# Altium PCB HARDWARE.PcbDoc
Units mm, origin at the board's own origin, x right, y up, seen from the top; angles counter-clockwise.
Board outline 132.33 x 98.04 mm, 2 copper layers (Top Layer, Bottom Layer); 71 components, 54 nets, 339 pads, 33 vias.
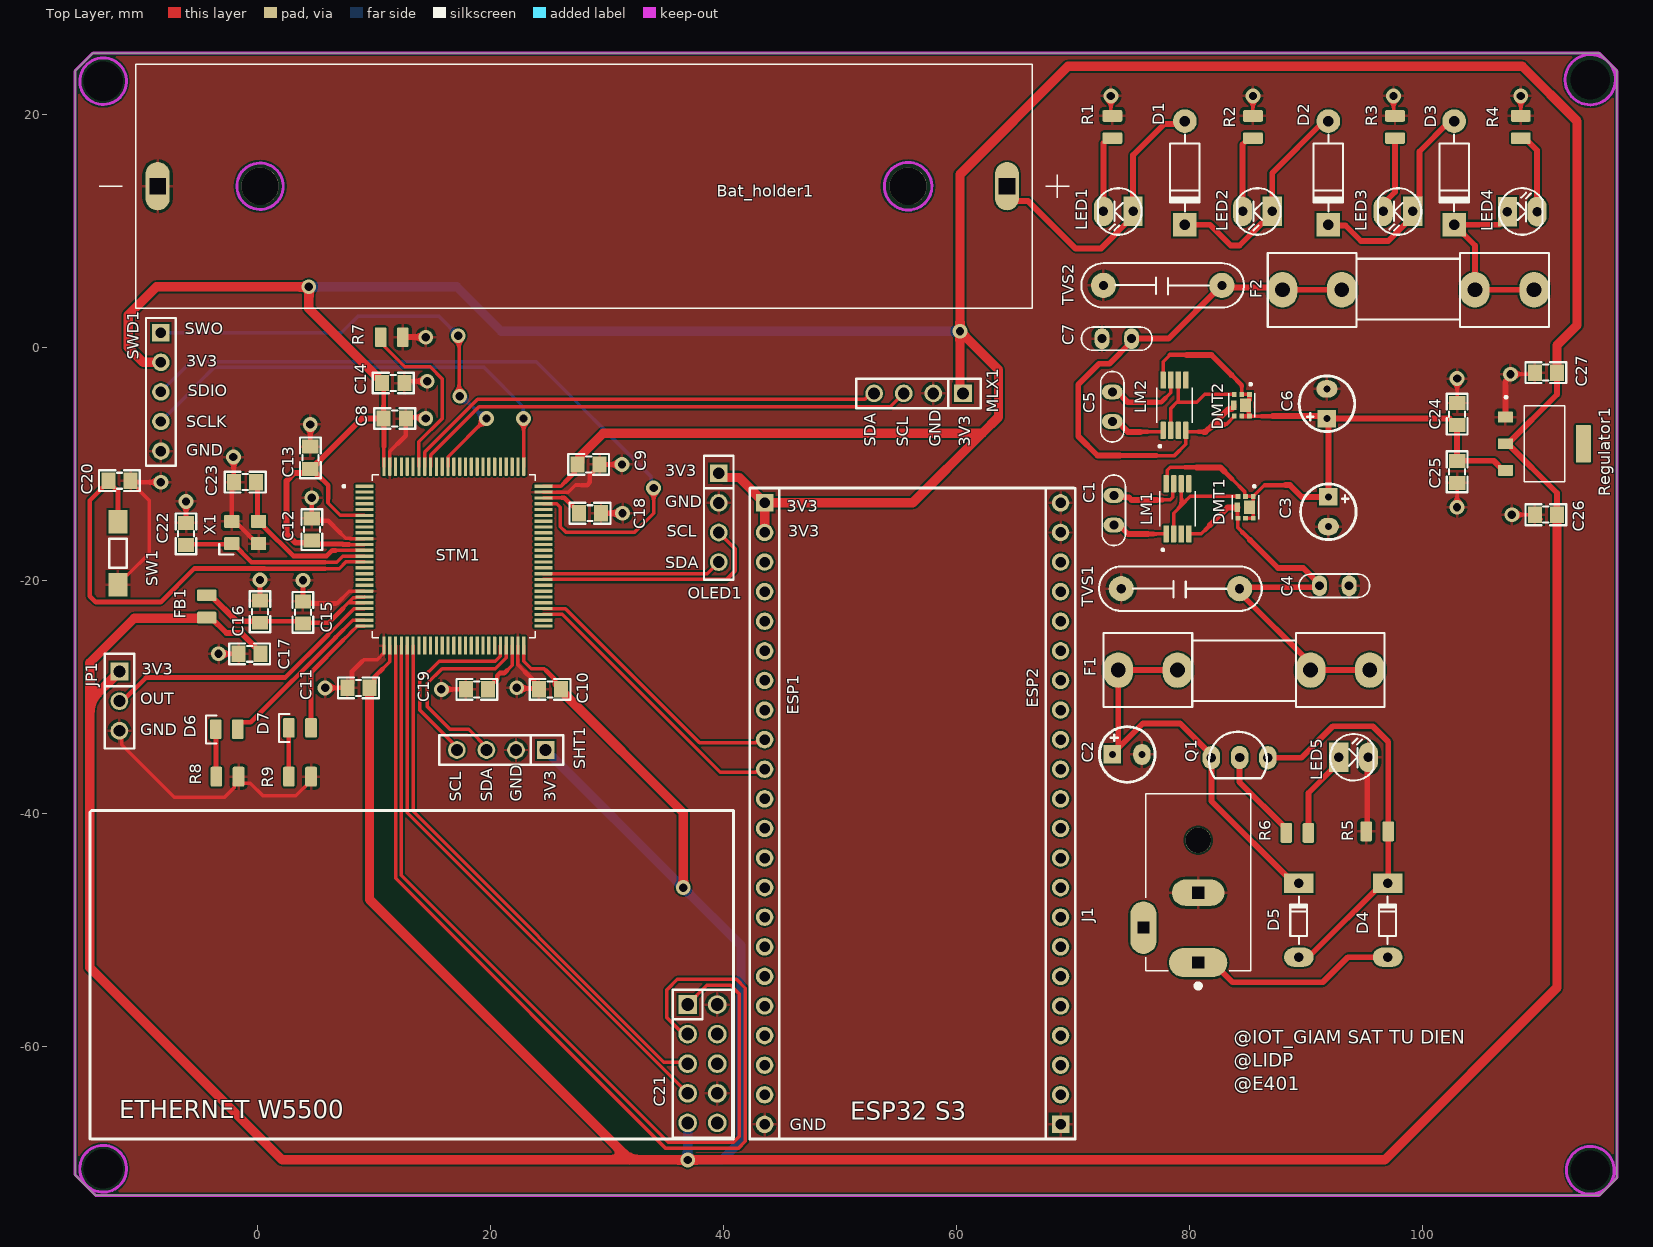
[diagram p0: Top Layer view]
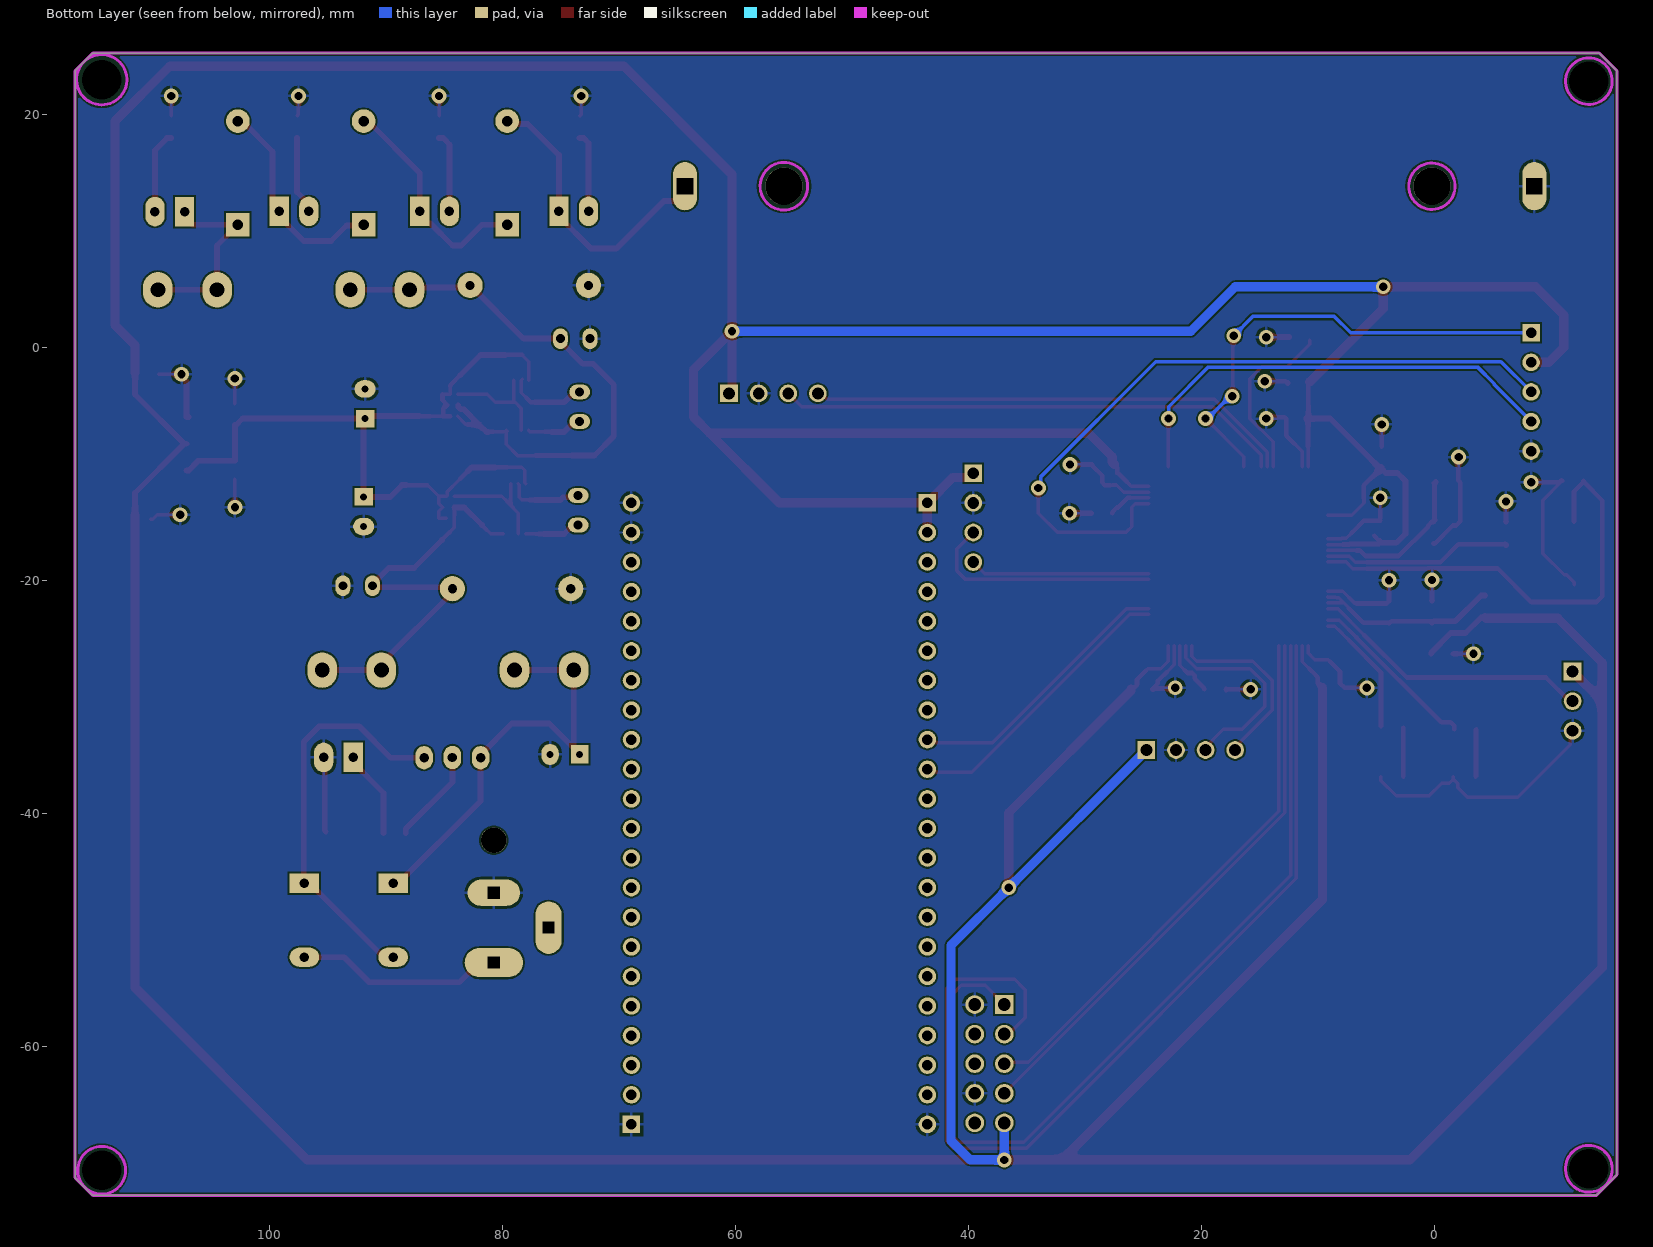
[diagram p1: Bottom Layer view, seen from below]
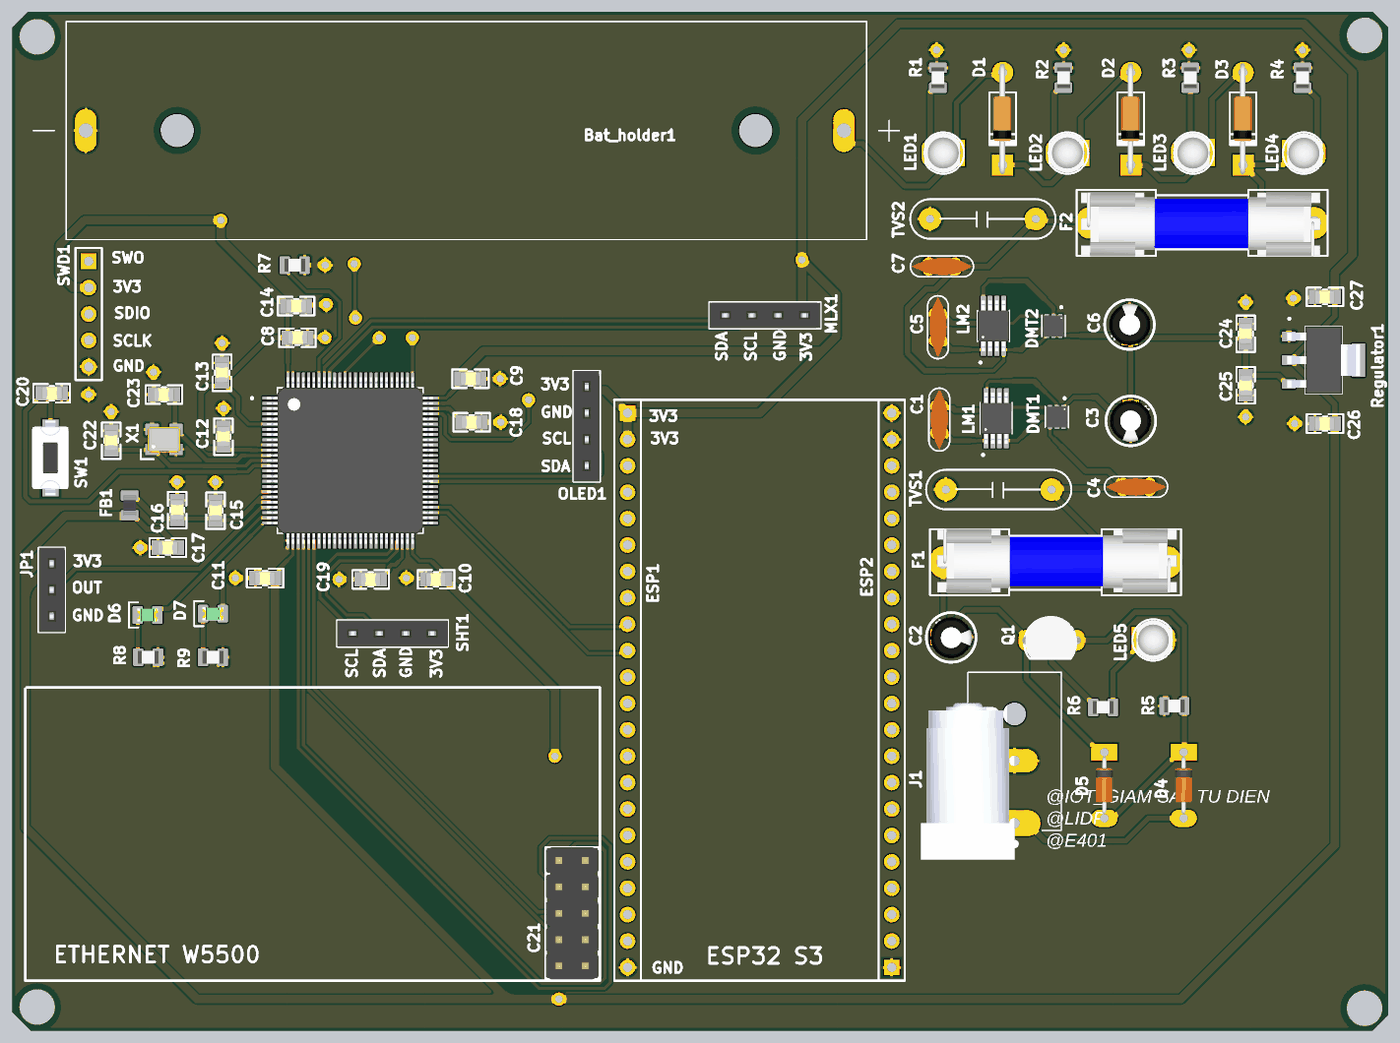
[diagram p2: 3D render of the assembled board from above, using the file's embedded part models]

## Layer stack, top to bottom
Top Solder: solder mask 0.0102, Solder Resist, Dk 3.5
Top Layer: signal copper 0.0356
Dielectric 1: dielectric 0.32, FR-4, Dk 4.8
Bottom Layer: signal copper 0.0356
Bottom Solder: solder mask 0.0102, Solder Resist, Dk 3.5

## Board outline
-15.621,-70.993 -13.843,-72.771 115.189,-72.771 116.713,-71.247 116.713,23.749 115.189,25.273 -14.097,25.273 -15.621,23.749

## Design rules (kind name [scope] priority, off if disabled: settings)
Clearance [All] p1: gap=0.15 ignorepadtopadclearanceinfootprint=FALSE
PolygonConnect [All] p1: connectstyle=Relief reliefconductorwidth=0.254 reliefentries=4 polygonreliefangle="90 Angle" airgapwidth=0.254
RoutingVias [All] p1: holewidth=0.711 width=1.27 viastyle="Through Hole" minholewidth=0.711 minwidth=1.27 maxholewidth=0.711 maxwidth=1.27
SolderMaskExpansion [All] p1: expansion=0.102 istentingtop=FALSE
UnRoutedNet [All] p1: checkbadconnections=TRUE
Width [All] p1: maxlimit=1 minlimit=0.254 preferedwidth=0.3 minimp=50.000000 maximp=50.000000 favimp=50.000000
29 further rules are at their usual default settings.

## Classes and differential pairs
component class Regulator: 32 C24 C25 C26 C27 Regulator1
component class POWER: Bat_holder1 C1 C2 C3 C4 C5 C6 C7 D4 D5 DMT1 DMT2 F1 F2 J1 LED5 LM1 LM2 Q1 R5 R6 TVS1 TVS2
component class MCU: C8 C9 C10 C11 C12 C13 C14 C15 C16 C17 C18 C19 C20 C21 C22 C23 D6 D7 ESP1 ESP2 FB1 JP1 MLX1 OLED1 R7 R8 R9 SHT1 STM1 SW1 SWD1 X1
component class Bat_indicator: D1 D2 D3 LED1 LED2 LED3 LED4 R1 R2 R3 R4

## Components (designator, comment, footprint, x,y, rotation, side; value= is the part's Value field where it differs from the comment)
Bat_holder1 "3.7V" BAT_BK-18650-PC2 28.067,13.843 r180 top
C1 "Capacitor Ceramic" CAP_CERAMIC 73.533,-15.24 r90 top value=33p
C2 "Cap Pol" C3MM 74.676,-34.925 r0 top
C3 "Cap Pol" C3MM 91.948,-14.097 r270 top
C4 "Capacitor Ceramic" CAP_CERAMIC 93.726,-20.447 r180 top value=33p
C5 "Capacitor Ceramic" CAP_CERAMIC 73.406,-6.35 r90 top value=33p
C6 "Cap Pol" C3MM 91.821,-4.826 r90 top
C7 "Capacitor Ceramic" CAP_CERAMIC 72.517,0.762 r0 top value=33p
C8 "100nF" "Cap 0805" 11.811,-6.096 r0 top
C9 "100nF" "Cap 0805" 28.448,-10.033 r0 top
C10 "100nF" "Cap 0805" 25.146,-29.337 r180 top
C11 "100nF" "Cap 0805" 8.706,-29.213 r180 top
C12 "100nF" "Cap 0805" 4.699,-15.621 r90 top
C13 "100nF" "Cap 0805" 4.569,-9.468 r90 top
C14 "4.7uF" "Cap 0805" 11.684,-3.048 r0 top
C15 "100nF" "Cap 0805" 3.937,-22.733 r90 top
C16 "100nF" "Cap 0805" 0.251,-22.676 r90 top
C17 "100nF" "Cap 0805" -0.635,-26.289 r180 top
C18 "2.2uF" "Cap 0805" 28.575,-14.224 r180 top
C19 "2.2uF" "Cap 0805" 18.866,-29.34 r180 top
C20 "100nF" "Cap 0805" -11.811,-11.43 r0 top
C21 "Ethernet W5500" JP5-D2T 38.227,-61.468 r270 top
C22 "10pF" "Cap 0805" -6.096,-16.002 r90 top
C23 "10pF" "Cap 0805" -1.016,-11.557 r180 top
C24 "10uF" "Cap 0805" 102.997,-5.715 r90 top
C25 "100nF" "Cap 0805" 102.997,-10.668 r270 top
C26 "10uF" "Cap 0805" 110.617,-14.351 r180 top
C27 "100nF" "Cap 0805" 110.617,-2.159 r180 top
D1 "1N4007" D1A 79.629,19.431 r90 top
D2 "1N4007" D1A 91.948,19.431 r90 top
D3 "1N4007" D1A 102.743,19.431 r90 top
D4 "1N4148" D0.5A 97.028,-49.149 r270 top
D5 "1N4148" D0.5A 89.408,-49.149 r270 top
D6 "GREEN" LED_0805_GREEN -2.601,-32.766 r0 top
D7 "GREEN" LED_0805_GREEN 3.683,-32.639 r0 top
DMT1 "DMT6016LFDF-7" TRANS_DMT6016LFDF-7 84.836,-13.716 r270 top
DMT2 "DMT6016LFDF-7" TRANS_DMT6016LFDF-7 84.52,-4.953 r270 top
ESP1 "ESP32 S3" HDR1X22 43.561,-13.335 r270 top
ESP2 "ESP32 S3" HDR1X22 68.961,-66.675 r90 top
F1 "F1A" Fuse 84.709,-27.686 r0 top value=Fuse
F2 "F1A" Fuse 98.806,4.953 r180 top value=Fuse
FB1 "100R" FB_0805 -4.318,-22.225 r270 top
J1 "PJ-058A" CUI_PJ-058A 80.772,-52.791 r90 top
JP1 "SOUND" "JP 1x3 CT" -11.811,-27.813 r270 top
LED1 "RED" LED-3 75.184,11.684 r180 top value="LED 3 ly Single Colour"
LED2 "YELLOW" LED-3 87.122,11.684 r180 top value="LED 3 ly Single Colour"
LED3 "YELLOW" LED-3 99.187,11.684 r180 top value="LED 3 ly Single Colour"
LED4 "GREEN" LED-3 107.315,11.666 r0 top value="LED 3 ly Single Colour"
LED5 "LED" LED-3 92.837,-35.179 r0 top value="LED 3 ly Single Colour"
LM1 "LM74610QDGKRQ1" SOP65P490X110-8N 78.994,-13.843 r90 top
LM2 "LM74610QDGKRQ1" SOP65P490X110-8N 78.74,-4.953 r90 top
MLX1 "JP4" JP4-C1T 60.579,-3.937 r180 top
OLED1 "JP4" JP4-C1T 39.624,-10.795 r270 top
Q1 "PNP" TRAN-LOWPOWER 84.189,-35.33 r270 top
R1 "220" RES_0805 73.406,18.923 r270 top
R2 "47" RES_0805 85.471,18.923 r270 top
R3 "220" RES_0805 97.663,18.923 r270 top
R4 "47" RES_0805 108.458,18.923 r270 top
R5 "1k" RES_0805 96.139,-41.529 r0 top
R6 "1k" RES_0805 89.281,-41.656 r180 top
R7 "10k" RES_0805 11.557,0.889 r180 top
R8 "220" RES_0805 -2.54,-36.83 r180 top
R9 "220" RES_0805 3.683,-36.83 r180 top
Regulator1 "AMS1117-5.0" SOT229P700X180-4N 110.49,-8.255 r270 top
SHT1 "JP4" JP4-C1T 24.765,-34.544 r180 top
STM1 "STM32H743VIT6" QFP50P1600X1600X160-100N 16.891,-17.907 r0 top
SW1 "DTSM-3" DTSM-3 -11.938,-17.653 r90 top
SWD1 "SWD" HDR1X5 -8.255,1.27 r270 top
TVS1 "TVS" CN4 84.328,-20.701 r180 top value="Zenner Protect AC input"
TVS2 "TVS" CN4 82.804,5.334 r180 top value="Zenner Protect AC input"
X1 "25MHz" XTAL_3225 -1.016,-15.875 r0 top

## Footprints (in the part's own frame and the unit in brackets; to place one, negate y for a bottom-side part, rotate by r counter-clockwise, add the part's x,y. Pads: shape width x height; smd on the part's side, far side on the other; paste and mask are expansions set on the pad)
BAT_BK-18650-PC2 [mm]
  oval 2.07x4.14 hole 1.38 square: NEG(36.6,0) POS(-36.3,0)
  round 3.2 hole 3.2 unplated: ""(-27.805,0) ""(27.81,0)
  silkscreen extent -41.63,-10.49 41.63,10.49
C3MM [mm]
  rect 1.5x1.58 hole 0.6: 1(-1.27,0)
  oval 1.5x1.8 hole 0.6: 2(1.27,0)
  silkscreen extent -2.39,-2.39 2.39,2.39, body extent -2,-2.03 1.99,1.97, height 7.01
"Cap 0805" [mm] "Compoment SMD 80x50mil"
  rect 1.2x1.4 smd: 1(-0.946,-0.003) 2(0.954,-0.003)
  silkscreen extent -1.75,-0.89 1.75,0.89, body extent -0.97,-0.61 1.03,0.64, height 1.23
CAP_CERAMIC [mil] "Tu gom mini"
  oval 50x70 hole 30: 1(0,0) 2(100,0)
  silkscreen extent -69,-39 169,39, body extent -65,-33 165,33, height 241
CN4 [mil] "Cap np W 0.4"
  round 85 hole 31: 1(0,0) 2(400,0)
  silkscreen extent -75,-75 475,75
CUI_PJ-058A [mm]
  oval 2.5x5 hole 1 square: 1(0,0)
  oval 2.25x4.5 hole 1 square: 2(6,0)
  oval 4.5x2.25 hole 1 square: 3(3,4.7)
  round 2.2 hole 2.2 unplated: ""(10.5,0)
  silkscreen extent -2.2,-4.5 14.5,4.5, body extent -3.5,-0.45 11.7,9, height 4.5
D0.5A [mil] "Diode muoi, W 80mil, L 300mil"
  oval 65x100 hole 32: 1(125,0)
  rect 65x100 hole 32: 2(-125,0)
  silkscreen extent -80,-30 80,28, body extent -108,-33 108,32, height 61
D1A [mil] "Diode 1A, W 100mil, L 350mil"
  round 80 hole 35: 1(0,0)
  rect 80x80 hole 35: 2(-350,0)
  silkscreen extent -305,-50 -45,50, body extent -386,-33 34,36, height 84
DTSM-3 [mm]
  rect 2x1.6 smd: 1(-2.7,0) 2(2.7,0)
  silkscreen extent -1.25,-0.75 1.25,0.75, body extent -3.6,-1.75 3.6,1.75, height 4.96
FB_0805 [mm]
  rrect25% 1x1.7 smd: 1(-0.95,0) 2(0.95,0)
  body extent -1,-0.63 1,0.63, height 0.86
Fuse [mil] "De Fuse"
  oval 100x120 hole 50: 1(-425,0) 1(-225,0) 2(225,0) 2(425,0)
  silkscreen extent -475,-125 475,125, body extent -448,-117 459,127, height 378
HDR1X5 [mm] "Connector; Header; 5 Position"
  rect 1.5x1.5 hole 0.9: 1(0,0)
  round 1.5 hole 0.9: 2(2.54,0) 3(5.08,0) 4(7.62,0) 5(10.16,0)
  silkscreen extent -1.27,-1.27 11.43,1.27
HDR1X22 [mm] "Connector; Header; 22 Position"
  rect 1.5x1.5 hole 0.9: 1(0,0)
  round 1.5 hole 0.9: 2(2.54,0) 3(5.08,0) 4(7.62,0) 5(10.16,0) 6(12.7,0) 7(15.24,0) 8(17.78,0) 9(20.32,0) 10(22.86,0) 11(25.4,0) 12(27.94,0) 13(30.48,0) 14(33.02,0) 15(35.56,0) 16(38.1,0) 17(40.64,0) 18(43.18,0) 19(45.72,0) 20(48.26,0) 21(50.8,0) 22(53.34,0)
  silkscreen extent -1.27,-1.27 54.61,1.27
JP4-C1T [mm] "4 row, straight, gold plating"
  rect 1.52x1.52 hole 1.02: 1(0,0)
  round 1.52 hole 1.02: 2(2.54,0) 3(5.08,0) 4(7.62,0)
  silkscreen extent -1.52,-1.27 9.14,1.27, body extent -1.52,-1.25 9.14,1.25, height 8.51
JP5-D2T [mm] "10 pins, dual pin, straight, gold plating"
  rect 1.6x1.6 hole 1.1: 1(-5.08,-1.27)
  round 1.6 hole 1.1: 2(-2.54,-1.27) 3(0,-1.27) 4(2.54,-1.27) 5(5.08,-1.27) 6(5.08,1.27) 7(2.54,1.27) 8(0,1.27) 9(-2.54,1.27) 10(-5.08,1.27)
  silkscreen extent -6.35,-2.54 6.35,2.54, body extent -6.35,-2.54 6.35,2.54, height 8.55
"JP 1x3 CT" [mm]
  rect 1.52x1.52 hole 1.02: 1(0,0)
  round 1.52 hole 1.02: 2(2.54,0) 3(5.08,0)
  silkscreen extent -1.52,-1.27 6.6,1.27, body extent -1.52,-1.25 6.6,1.25, height 8.51
LED-3 [mil] "LED 2 PIN, 3ly Only colour"
  rect 65x100 hole 32: 1(0,0)
  oval 65x100 hole 32: 2(100,0)
  silkscreen extent -29,-78 118,79, body extent -13,-75 125,75, height 217
LED_0805_GREEN [mm]
  rrect25% 1x1.7 smd: A(0.95,0) K(-0.95,0)
  silkscreen extent -1.8,-1.2 -0.9,1.2, body extent -1,-0.63 1,0.63, height 1.12
QFP50P1600X1600X160-100N [mm]
  rrect25% 1.56x0.28 smd: 1(-7.68,6) 2(-7.68,5.5) 3(-7.68,5) 4(-7.68,4.5) 5(-7.68,4) 6(-7.68,3.5) 7(-7.68,3) 8(-7.68,2.5) 9(-7.68,2) 10(-7.68,1.5) 11(-7.68,1) 12(-7.68,0.5) 13(-7.68,0) 14(-7.68,-0.5) 15(-7.68,-1) 16(-7.68,-1.5) 17(-7.68,-2) 18(-7.68,-2.5) 19(-7.68,-3) 20(-7.68,-3.5) 21(-7.68,-4) 22(-7.68,-4.5) 23(-7.68,-5) 24(-7.68,-5.5) 25(-7.68,-6) 51(7.68,-6) 52(7.68,-5.5) 53(7.68,-5) 54(7.68,-4.5) 55(7.68,-4) 56(7.68,-3.5) 57(7.68,-3) 58(7.68,-2.5) 59(7.68,-2) 60(7.68,-1.5) 61(7.68,-1) 62(7.68,-0.5) 63(7.68,0) 64(7.68,0.5) 65(7.68,1) 66(7.68,1.5) 67(7.68,2) 68(7.68,2.5) 69(7.68,3) 70(7.68,3.5) 71(7.68,4) 72(7.68,4.5) 73(7.68,5) 74(7.68,5.5) 75(7.68,6)
  rrect25% 0.28x1.56 smd: 26(-6,-7.68) 27(-5.5,-7.68) 28(-5,-7.68) 29(-4.5,-7.68) 30(-4,-7.68) 31(-3.5,-7.68) 32(-3,-7.68) 33(-2.5,-7.68) 34(-2,-7.68) 35(-1.5,-7.68) 36(-1,-7.68) 37(-0.5,-7.68) 38(0,-7.68) 39(0.5,-7.68) 40(1,-7.68) 41(1.5,-7.68) 42(2,-7.68) 43(2.5,-7.68) 44(3,-7.68) 45(3.5,-7.68) 46(4,-7.68) 47(4.5,-7.68) 48(5,-7.68) 49(5.5,-7.68) 50(6,-7.68) 76(6,7.68) 77(5.5,7.68) 78(5,7.68) 79(4.5,7.68) 80(4,7.68) 81(3.5,7.68) 82(3,7.68) 83(2.5,7.68) 84(2,7.68) 85(1.5,7.68) 86(1,7.68) 87(0.5,7.68) 88(0,7.68) 89(-0.5,7.68) 90(-1,7.68) 91(-1.5,7.68) 92(-2,7.68) 93(-2.5,7.68) 94(-3,7.68) 95(-3.5,7.68) 96(-4,7.68) 97(-4.5,7.68) 98(-5,7.68) 99(-5.5,7.68) 100(-6,7.68)
  silkscreen extent -9.54,-7 7,7, body extent -8,-8 8,8, height 1.6
RES_0805 [mm]
  rrect25% 1x1.7 smd: 1(-0.95,0) 2(0.95,0)
  body extent -1,-0.63 1,0.63, height 0.47
SOP65P490X110-8N [mm]
  rrect25% 1.47x0.48 smd: 1(-2.15,0.975) 2(-2.15,0.325) 3(-2.15,-0.325) 4(-2.15,-0.975) 5(2.15,-0.975) 6(2.15,-0.325) 7(2.15,0.325) 8(2.15,0.975)
  silkscreen extent -3.62,-1.54 1.5,1.54, body extent -2.45,-1.5 2.45,1.5, height 1.1
SOT229P700X180-4N [mm]
  rrect15% 0.93x1.31 smd: 1(-2.29,-3.345) 2(0,-3.345) 3(2.29,-3.345)
  rrect15% 3.24x1.31 smd: 4(0,3.345)
  silkscreen extent -4.09,-3.4 3.25,1.75, body extent -3.25,-3.5 3.25,3.5, height 1.8
TRAN-LOWPOWER [mm] "TO, Flat Index; 3 In-Line, Axial Leads; Body Dia. 4.5mm; Leads 0.51 x 0.48 mm (max)"
  oval 2x1.5 hole 0.8: 1(-0.127,-2.286) 2(-0.151,0.139) 3(-0.127,2.564)
  silkscreen extent -2.35,-2.48 1.63,2.48, body extent -2.48,-2.79 1.52,3.01, height 11
TRANS_DMT6016LFDF-7 [mm]
  rect 0.425x0.4 smd mask+0: 1(-0.937,0.65) 2(-0.937,0) 3(-0.937,-0.65) 4(0.937,-0.65) 5(0.937,0) 6(0.937,0.65)
  rect 0.8x0.48 smd mask+0.04: 7(0,-0.7)
  rect 1.15x0.95 smd paste-2 mask+0: 8(0,0.325)
  silkscreen extent -1.9,-1.12 1.02,1.12, body extent -1,-1 1,1, height 0.63
XTAL_3225 [mm]
  rrect10% 1.3x1.1 smd: 1(-1.15,-0.95) 2(1.15,-0.95) 3(1.15,0.95) 4(-1.15,0.95)
  silkscreen extent -2.23,-1.89 -1,-1, body extent -1.6,-1.28 1.6,1.22, height 0.61

## Part data
Bat_holder1: library part BK-18650-PC2, "Battery Holder (Open) 18650 1 Cell PC Pin", Package=None, Availability=Unavailable, MP=BK-18650-PC2, Price=None
C1 C4 C5 C7: library part CapCeramic, "Capacitor", LatestRevisionDate=17-Jul-2002, LatestRevisionNote="Re-released for DXP Platform.", PackageReference=RAD-0.3, Published=8-Jun-2000, Publisher="Altium Limited"
C2 C3 C6: "Polarized Capacitor (Axial)", LatestRevisionDate=17-Jul-2002, LatestRevisionNote="Re-released for DXP Platform.", PackageReference=POLAR0.8, Published=8-Jun-2000, Publisher="Altium Limited"
C8 C9 C10 C11 C12 C13 C14 C15 C16 C17 C18 C19 C20 C22 C23 C24 C25 C26 C27: library part "Cap 0805", "Capacitor SMD 0805"
C21: library part JP5x2, "WR-PHD 2.54 mm Dual Socket Header", Manufacturer="W¨¹rth Elektronik eiSos GmbH", partNo=61301021821, ComponentLink1 Description=Manufacturer, ComponentLink1URL=http://www.we-online.com, ComponentLink2 Description=Datasheet, ComponentLink2URL=http://katalog.we-online.de/em/datasheet/6130xx21821.pdf, Created by="Karrer Zheng", Created Date="29 March 2013", NoPins=10
D1 D2 D3: library part D1A, "Diode 1A"
D4 D5: library part D0.5A, "D0.5A"
D6 D7: library part LED_0805_GREEN, "LED 0805 GREEN SMD"
DMT1 DMT2: "Transistor, 60V, N-channel, enhancement mode MOSFET, 60V, U-DFN2020-6", Package="UDFN-6 Diodes Inc.", Check_prices=https://www.snapeda.com/parts/DMT6016LFDF-7/Diodes+Inc./view-part/?ref=eda, MF="Diodes Inc.", MP=DMT6016LFDF-7, SnapEDA_Link=https://www.snapeda.com/parts/DMT6016LFDF-7/Diodes+Inc./view-part/?ref=snap
ESP1 ESP2: library part "Header 22", "Header, 22-Pin", LatestRevisionDate=17-Jul-2002, LatestRevisionNote="Re-released for DXP Platform.", Publisher="Altium Limited"
F1 F2: library part Fuse, "Fuse", Designed by=VanDungEvn
FB1: library part FB_0805, "Ferrite Bead SMD 0805"
J1: "2.0 x 5.7 mm, 2.5 A, Horizontal, Through Hole, Locking Type, Dc Power Jack Connector", Package=None, Check_prices=https://www.snapeda.com/parts/PJ-058A/Same+Sky/view-part/?ref=eda, MF="Same Sky", MP=PJ-058A, SnapEDA_Link=https://www.snapeda.com/parts/PJ-058A/Same+Sky/view-part/?ref=snap
JP1: library part "JP 1x3 2.54 Cai Thang", "Cắm", Chung_Loai=Cắm, Don_Vi=Con, Ma_Hang=MH004006, Ten_Linh_Kien="Jump Đơn Cái 2.54MM 1x20P Thẳng"
LED1 LED2 LED3 LED4: library part LED, "LED Single colour Green and Red"
LED5: "LED Single colour Green and Red"
LM1 LM2: "0.48-V to 42-V, zero IQ automotive ideal diode controller 8-VSSOP -40 to 125", Case/Package=VSSOP, Manufacturer="Texas Instruments", Max Operating Temperature=125°C, Min Operating Temperature=-40°C, Operating Supply Current=0A, Package Quantity=2500, Quiescent Current=0pA, Supplier Part Number 1=595-LM74610QDGKRQ1, Category="Power Management ICs", ComponentLink1Description=http://www.ti.com/lit/ds/symlink/lm74610-q1.pdf?src-supplier=Digikey, ComponentLink1URL=http://www.ti.com/lit/ds/symlink/lm74610-q1.pdf?src-supplier=Digikey, Lead Free="Lead Free", Manufacturer Part Number=LM74610QDGKRQ1, Mount="Surface Mount", Number of Pins=8, Packaging="Cut Tape", Pricing 1="1=2.07, 10=1.54, 50=1.4, 100=1.25, 1000=1.1, 10000=1.01 (USD)", RoHS=Yes, RoHS Compliant=Yes, Series="Automotive, AEC-Q100", Stock 1=3008, Supplier 1=Mouser, Weight=0.005997oz
MLX1 OLED1 SHT1: "WR-PHD 2.54 mm Angled Socket Header", Manufacturer="W¨¹rth Elektronik eiSos GmbH", partNo=613004143121, ComponentLink1 Description=Manufacturer, ComponentLink1URL=http://www.we-online.com, ComponentLink2 Description=Datasheet, ComponentLink2URL=http://katalog.we-online.de/em/datasheet/6130xx143121.pdf, Created by="Karrer Zheng", Created Date="29 March 2013", NoPins=04
Q1: "PNP General", PackageDocument=Sep-1998, Code_JEDEC=TO-92A, ComponentLink1Description="Manufacturer Link", ComponentLink1URL=http://www.fairchildsemi.com/, ComponentLink2Description=Datasheet, ComponentLink2URL=http://www.fairchildsemi.com/ds/2N%2F2N3906.pdf, DatasheetDocument=1997, LatestRevisionDate=15-Jan-2003, LatestRevisionNote="PCB Footprint 'BCY-W3/D4.7' replaced", PackageReference=TO-92A, Published=8-Jun-2000, Publisher="Altium Limited"
R1 R2 R3 R4 R5 R6 R7 R8 R9: library part RES_0805, "Resistor SMD 0805"
Regulator1: "1A LOW DROPOUT VOLTAGE REGULATOR", Package="SOT-223 Seeed Technology", Availability="Not in stock", Check_prices=https://www.snapeda.com/parts/AMS1117-5.0/ams/view-part/?ref=eda, MF=ams, MP=AMS1117-5.0, Price=None, SnapEDA_Link=https://www.snapeda.com/parts/AMS1117-5.0/ams/view-part/?ref=snap
STM1: "ARMÂ® CortexÂ®-M7 STM32H7 Microcontroller IC 32-Bit Single-Core 480MHz 2MB (2M x 8) FLASH 100-LQFP (14x14)", Package="LQFP-100 STMicroelectronics", Check_prices=https://www.snapeda.com/parts/STM32H743VIT6/STMicroelectronics/view-part/?ref=eda, MF=STMicroelectronics, MP=STM32H743VIT6, SnapEDA_Link=https://www.snapeda.com/parts/STM32H743VIT6/STMicroelectronics/view-part/?ref=snap
SW1: "Tactile Switch SMD SPST", Manufacturer=Diptronics, Manufacturer Part Number=DTSM-3
SWD1: library part "Header 5", "Header, 5-Pin", LatestRevisionDate=17-Jul-2002, LatestRevisionNote="Re-released for DXP Platform.", Publisher="Altium Limited"
TVS1 TVS2: "Generic TVS Diode"
X1: library part TSX-3225_24.0000MF15X-AC, "Crystal SMD 24MHz 10PPM 7pF 3225", Manufacturer=Epson, Manufacturer Part Number="TSX-3225 24.0000MF15X-AC"

## Free pads (board coordinates)
  round 1.524 hole 3.4: 11(-13.208,-70.485) 12(-13.208,22.86) 13(114.427,22.987) 14(114.427,-70.612)

## Via types
v1: diameter 1.27, hole 0.711, Top Layer to Bottom Layer, 33 vias

## Nets (pads, with @x,y where several pads share a name; then routed paths per layer and width w, separated by ;. In a path a pad name is that pad's centre, name@x,y a point inside that pad or via, vN(x,y) a via of type N, cw(c..) or ccw(c..) an arc to the next point about the centre after c; other vN are vias at no path point)
3V3: C8.1 C9.1 C10.1 C11.1 C12.1 C13.1 C14.1 C17.1 C21.5 C26.1 C27.1 ESP1.1 ESP1.2 FB1.2 JP1.1 MLX1.1 OLED1.1 Regulator1.2 SHT1.1 STM1.6 STM1.11 STM1.27 STM1.50 STM1.75 STM1.100 SWD1.2 | length 680.3
  Top Layer w0.3: 6.096,-12.954 6.096,-13.362 7.141,-14.407 STM1.6 ; 7.89,-16.907 STM1.11 ; 10.795,-27.559 11.391,-26.963 STM1.27 ; STM1.100 10.891,-8.507 ; STM1.50 22.891,-26.924 23.526,-27.559 24.638,-27.559 24.765,-27.686 ; STM1.75 26.066,-11.907 26.416,-11.557
  Top Layer w0.4: C12.1@4.699,-16.759 4.808,-16.868 7.343,-16.868 7.382,-16.907 7.89,-16.907 ; C12.1 4.802,-16.567 5.202,-16.167 C12.1@5.202,-16.156 ; C13.1@4.799,-10.541 6.096,-11.838 6.096,-12.954 ; C11.1 10.052,-28.81 10.052,-28.302 10.16,-28.194 10.795,-27.559 ; C14.1@10.738,-2.951 10.865,-3.078 C8.1 ; 10.891,-8.507 C8.1@10.891,-6.125 ; 24.765,-27.686 25.565,-28.486 25.565,-28.934 C10.1@25.965,-29.334 ; 26.416,-11.557 27.178,-10.795 27.268,-10.795 27.268,-10.271 C9.1
  Top Layer w0.5: FB1.2 -3.968,-23.175 -2.632,-24.511 -1.364,-24.511 0.311,-26.186 C17.1 ; C12.1@4.699,-16.759 3.297,-16.759 2.54,-16.002 2.54,-11.43 3.206,-10.764 4.222,-10.764 C13.1 4.672,-10.414 8.987,-6.099 C8.1 ; Regulator1.2 Regulator1.2@107.335,-8.255 ; C26.1 111.563,-12.483 Regulator1.2@107.335,-8.255 ; C27.1 111.563,-4.027 Regulator1.2@107.335,-8.255
  Top Layer w0.8: JP1.1 -14.351,-30.353 ; SWD1.2 -9.779,-1.27 -11.049,0 -11.049,2.794 -8.636,5.207 v1(4.445,5.207) 4.445,3.342 C14.1@10.738,-2.951 ; FB1.2 -4.384,-23.241 -10.541,-23.241 -14.351,-27.051 -14.351,-30.353 ; C13.1@4.672,-10.414 C13.1@4.799,-10.541 ; C11.1 9.652,-47.371 32.004,-69.723 ; C8.1 C8.1@10.891,-6.125 ; C10.1 26.092,-29.434 36.576,-39.918 v1(36.576,-46.355) ; C9.1 27.702,-9.836 27.702,-9.382 29.718,-7.366 62.23,-7.366 ; OLED1.1 39.984,-11.155 41.381,-11.155 ESP1.1 ; ESP1.2 ESP1.1 ; MLX1.1 60.325,-3.683 v1(60.325,1.397) ; C26.1 111.563,-54.934 96.774,-69.723 v1(36.957,-69.723) 32.004,-69.723 ; C27.1 111.563,0.184 113.284,1.905 113.284,19.431 108.585,24.13 69.596,24.13 60.325,14.859 v1(60.325,1.397) ; -14.351,-30.353 -14.351,-53.213 2.159,-69.723 32.004,-69.723 ; ESP1.1 56.261,-13.335 62.23,-7.366 ; v1(60.325,1.397) 63.627,-1.905 63.627,-5.969 62.23,-7.366
  Bottom Layer w0.8: v1(4.445,5.207) 17.145,5.207 20.955,1.397 v1(60.325,1.397) ; SHT1.1 v1(36.576,-46.355) 41.529,-51.308 41.529,-68.072 39.878,-69.723 v1(36.957,-69.723) C21.5
5V: C21.6
E_SCLK: C21.1 STM1.29 | length 76
  Top Layer w0.3: STM1.29 12.391,-45.284 35.306,-68.199 40.894,-68.199 41.402,-67.691 41.402,-55.499 40.64,-54.737 38.608,-54.737 C21.1
E_SCS: C21.2 STM1.28 | length 85.1
  Top Layer w0.3: STM1.28 11.891,-45.546 35.052,-68.707 41.322,-68.707 41.91,-68.119 41.91,-54.991 41.148,-54.229 36.068,-54.229 35.179,-55.118 35.179,-57.531 36.183,-58.535 36.212,-58.535 36.605,-58.928 C21.2
ESP_RX: ESP1.10 STM1.53 | length 24.5
  Top Layer w0.3: STM1.53 26.209,-22.907 39.751,-36.449 42.785,-36.449 42.81,-36.425 43.437,-36.425 ESP1.10@43.461,-36.449
ESP_TX: ESP1.9 STM1.54 | length 23.6
  Top Layer w0.3: STM1.54 26.471,-22.407 37.973,-33.909 42.785,-33.909 42.81,-33.885 ESP1.9@43.434,-33.885
GND: Bat_holder1.NEG C2.2 C3.2 C4.1 C6.2 C7.1 C8.2 C9.2 C10.2 C11.2 C12.2 C13.2 C14.2 C15.2 C16.2 C17.2 C18.1 C19.2 C20.2 C21.7 C21.10 C22.2 C23.2 C24.2 C25.2 C26.2 C27.2 ESP1.22 ESP2.1 ESP2.21 ESP2.22 J1.2 JP1.3 LED5.2 MLX1.2 OLED1.2 R1.1 R2.1 R3.1 R4.1 R5.1 R7.1 R8.1 R9.1 Regulator1.1 SHT1.2 STM1.10 STM1.19 STM1.26 STM1.49 STM1.74 STM1.99 SW1.1 SWD1.5 TVS1.2 TVS2.2 X1.2 X1.4 | length 128.2
  Top Layer w0.3: SW1.1 -11.938,-20.153 -11.288,-19.503 -11.088,-19.503 -9.271,-17.686 -9.271,-13.119 -10.857,-11.533 C20.2 ; JP1.3 -11.617,-33.087 -11.617,-34.103 -7.112,-38.608 -2.794,-38.608 -1.94,-37.754 -1.94,-37.405 R8.1@-1.59,-37.055 ; R8.1 R8.1@-1.59,-37.055 ; R9.1 4.633,-37.18 3.332,-38.481 0.508,-38.481 -0.568,-37.405 -1.24,-37.405 R8.1@-1.59,-37.055 ; 6.731,-21.971 6.858,-21.971 7.922,-20.907 STM1.19 ; 7.112,-15.875 7.62,-16.383 8.001,-16.383 8.015,-16.397 9.201,-16.397 STM1.10 ; 9.017,-26.924 9.144,-26.797 10.301,-26.797 10.891,-26.207 STM1.26 ; STM1.99 11.391,-8.929 12.058,-8.262 ; STM1.49 22.391,-27.217 22.987,-27.813 ; STM1.74 26.709,-12.407 27.305,-11.811 27.813,-11.811 ; v1(73.279,21.59) 73.279,20 R1.1 ; R2.1 v1(85.471,21.59) ; v1(97.536,21.59) 97.536,20 R3.1 ; v1@102.994,-13.208 C25.2 C25.2@102.994,-11.298 ; v1@102.997,-2.864 102.997,-4.828 C24.2@103,-4.831 ; v1(107.569,-2.286) C27.2@109.539,-2.286 ; v1(107.696,-14.351) 109.659,-14.351 C26.2 110.047,-14.732 C26.2@110.236,-14.732 ; R4.1 v1(108.458,21.59)
  Top Layer w0.4: C20.2 -10.73,-11.557 v1(-8.255,-11.557) ; C22.2@-6.094,-14.919 v1@-6.094,-13.21 ; v1@-3.3,-26.287 C17.2@-1.907,-26.287 ; v1@-2.001,-9.429 -2.001,-11.396 -2.166,-11.561 X1.4 -1.816,-15.275 -1.516,-15.275 0.034,-16.825 X1.2 ; v1(0.251,-19.95) 0.251,-21.719 C16.2@0.252,-21.72 ; v1(3.937,-19.973) 3.937,-21.775 C15.2 ; C15.2 4.133,-21.971 6.731,-21.971 ; C13.2 v1(4.572,-6.604) ; C12.2@4.699,-14.859 6.096,-14.859 7.112,-15.875 ; C12.2 v1(4.702,-12.889) ; v1(5.842,-29.21) C11.2 8.152,-28.81 8.152,-27.789 9.017,-26.924 ; 12.058,-8.262 12.765,-7.555 C8.2 12.88,-5.985 v1@14.367,-5.985 ; C14.2 12.792,-2.898 v1(14.605,-2.898) ; v1(15.818,-29.34) C19.2@17.91,-29.339 ; v1@22.345,-29.27 C10.2@24.065,-29.27 ; 22.987,-27.813 23.622,-28.448 23.792,-28.618 23.792,-28.834 24.065,-29.107 C10.2@24.065,-29.27 ; C10.2@24.065,-29.334 C10.2@24.065,-29.27 ; C10.2@24.128,-29.27 C10.2@24.065,-29.27 ; 27.813,-11.811 28.321,-11.811 28.555,-11.577 28.555,-10.983 29.402,-10.136 C9.2 v1(31.312,-10.036)
  Top Layer w0.5: C20.2 C20.2 ; v1(-6.096,-13.208) v1@-6.094,-13.21 ; C22.2@-6.094,-14.919 C22.2@-6.093,-14.921 ; v1(-3.302,-26.289) v1@-3.3,-26.287 ; v1(-2.032,-9.398) v1@-2.001,-9.429 ; C17.2@-1.907,-26.287 -1.905,-26.286 C17.2 ; C16.2@0.252,-21.72 C16.2 ; R7.1 v1(14.478,0.889) ; C14.2 C14.2 ; v1@14.367,-5.985 v1(14.478,-6.096) ; v1(15.818,-29.34) v1(15.818,-29.34) ; C19.2@17.91,-29.339 C19.2 ; v1(22.282,-29.207) v1@22.345,-29.27 ; C10.2@24.128,-29.27 C10.2 ; C18.1 29.522,-14.222 31.367,-14.222 v1(31.369,-14.224) ; R5.1 95.283,-41.435 95.283,-35.273 LED5.2 ; Regulator1.1@106.955,-5.965 Regulator1.1 107.145,-2.918 107.569,-2.494 v1(107.569,-2.286)
  other v1: 102.994,-13.716 102.997,-2.667
INT: C21.9
IR_CAM_SCL: MLX1.3 STM1.92 | length 43.8
  Top Layer w0.3: STM1.92 14.901,-10.217 14.901,-9.229 19.05,-5.08 54.356,-5.08 MLX1.3
IR_CAM_SDA: MLX1.4 STM1.93 | length 41.9
  Top Layer w0.3: STM1.93 14.401,-10.217 14.401,-8.967 18.923,-4.445 52.173,-4.445 52.681,-3.937 MLX1.4
LCD_SCL: OLED1.3 STM1.59 | length 20.6
  Top Layer w0.3: STM1.59 40.291,-19.907 41.021,-19.177 41.021,-17.272 OLED1.3
LCD_SDA: OLED1.4 STM1.60 | length 15.5
  Top Layer w0.3: STM1.60 38.632,-19.407 OLED1.4
"MCU VDDA": C15.1 C16.1 FB1.1 STM1.20 STM1.21 | length 17
  Top Layer w0.3: 7.386,-22.372 7.386,-22.332 7.811,-21.907 ; STM1.21 7.811,-21.907 ; STM1.20 9.201,-21.417 8.499,-21.417 8.453,-21.463 8.255,-21.463 7.811,-21.907
  Top Layer w0.4: C16.1 0.381,-23.495 3.757,-23.495 C15.1 3.997,-23.622 6.136,-23.622 7.386,-22.372
  Top Layer w0.5: FB1.1 -3.968,-21.275 -1.748,-23.495 0.127,-23.495 C16.1
MCU_BOOT0: R7.2 STM1.94 | length 15.1
  Top Layer w0.3: R7.2@10.734,0.635 10.734,0.285 12.67,-1.651 14.859,-1.651 15.875,-2.667 15.875,-6.097 13.891,-8.081 STM1.94
MCU_NRST: C20.1 STM1.14 SW1.2 | length 39.5
  Top Layer w0.3: 5.861,-18.988 7.047,-18.988 7.628,-18.407 STM1.14
  Top Layer w0.4: C20.1 C20.1@-12.757,-11.533 ; SW1.2 -11.938,-12.352 C20.1@-12.757,-11.533 ; 5.861,-18.988 0.682,-18.988 0.659,-18.965 -5.376,-18.965 -8.255,-21.844 -13.843,-21.844 -14.351,-21.336 -14.351,-13.128 C20.1@-12.757,-11.533
MCU_OSC_IN: C22.1 STM1.13 X1.1 | length 16.2
  Top Layer w0.3: 5.842,-18.438 6.835,-18.438 7.366,-17.907 STM1.13
  Top Layer w0.4: C22.1@-6.031,-16.886 -2.005,-16.886 -0.476,-18.415 2.672,-18.415 2.695,-18.438 5.842,-18.438
  Top Layer w0.5: C22.1 C22.1@-6.031,-16.886
MCU_OSC_OUT: C23.1 STM1.12 X1.3 | length 14
  Top Layer w0.3: 6.731,-17.418 8.498,-17.418 8.499,-17.417 9.201,-17.417 STM1.12
  Top Layer w0.4: X1.3@0.032,-14.823 C23.1@0.032,-11.656 ; X1.3 0.234,-14.925 0.584,-15.275 0.584,-15.375 3.097,-17.888 5.988,-17.888 6.458,-17.418 6.731,-17.418
  Top Layer w0.5: C23.1 C23.1@0.032,-11.656 ; X1.3@0.032,-14.823 X1.3
MCU_SWCLK: STM1.76 SWD1.4 | length 39.7
  Top Layer w0.3: v1(22.86,-6.096) 22.881,-6.117 22.881,-10.217 STM1.76
  Bottom Layer w0.3: SWD1.4 -5.08,-3.175 -5.08,-3.097 -3.657,-1.674 19.454,-1.674 22.86,-5.08 v1(22.86,-6.096)
MCU_SWDIO: STM1.72 SWD1.3 | length 62.6
  Top Layer w0.3: STM1.72 25.726,-13.407 26.035,-13.716 26.035,-15.367 26.543,-15.875 32.385,-15.875 34.036,-14.224 v1(34.036,-12.065)
  Bottom Layer w0.3: SWD1.3 -5.669,-1.224 23.957,-1.224 33.85,-11.117 33.85,-11.879 v1(34.036,-12.065)
MCU_SWO: STM1.89 SWD1.1 | length 40.6
  Top Layer w0.3: STM1.89 16.401,-10.217 16.401,-9.38 v1(19.685,-6.096) ; v1(17.272,1.016) 17.335,0.953 17.335,-4.127 v1(17.399,-4.191)
  Bottom Layer w0.3: SWD1.1 7.239,1.27 8.636,2.667 15.621,2.667 v1(17.272,1.016) ; v1(17.399,-4.191) 17.589,-4.191 19.494,-6.096 v1(19.685,-6.096)
MISO: C21.4 STM1.30 | length 48.4
  Top Layer w0.3: STM1.30 12.891,-39.943 34.726,-61.779 34.728,-61.779 C21.4
MOSI: C21.3 STM1.31 | length 46.8
  Top Layer w0.3: STM1.31 13.391,-39.807 34.913,-61.329 36.818,-61.329 C21.3
NetBat_holder1_POS: Bat_holder1.POS D1.1 LED1.1 | length 25.4
  Top Layer w0.5: Bat_holder1.POS 64.367,13.313 65.092,12.588 66.152,12.588 70.231,8.509 72.453,8.509 75.184,11.239 LED1.1 75.184,16.51 77.863,19.189 79.387,19.189 D1.1
NetC1_1: C1.1 LM1.1 | length 4.8
  Top Layer w0.3: 76.962,-16.002 77.216,-16.002 77.225,-15.993 LM1.1
  Top Layer w0.4: 76.454,-16.002 76.962,-16.002
  Top Layer w0.5: C1.1 73.995,-15.24 74.757,-16.002 76.454,-16.002
NetC1_2: C1.2 LM1.7 | length 6.5
  Top Layer w0.3: 77.724,-13.081 78.359,-13.081 78.579,-12.861 78.579,-11.783 LM1.7
  Top Layer w0.4: 77.216,-13.081 77.724,-13.081
  Top Layer w0.5: C1.2 73.68,-12.847 74.823,-12.847 75.057,-13.081 77.216,-13.081
NetC2_1: C2.1 D5.2 F1.1 Q1.1 | length 36.9
  Top Layer w0.5: C2.1 73.406,-34.885 C2.1@73.914,-34.377 ; F1.1@78.994,-27.686 73.914,-27.686 C2.1@73.914,-34.377 ; D5.2 88.963,-45.974 81.903,-38.914 Q1.1 81.903,-34.953 79.208,-32.258 76.033,-32.258 C2.1@73.914,-34.377
NetC3_1: C3.1 C6.1 C24.1 C25.1 DMT1.1 DMT1.2 DMT1.5 DMT1.6 DMT1.8 DMT2.1 DMT2.2 DMT2.5 DMT2.6 DMT2.8 LM1.8 LM2.8 Regulator1.3 | length 66.3
  Top Layer w0.3: LM2.8 77.765,-1.229 78.359,-0.635 ; LM1.8 78.109,-11.603 78.109,-10.537 78.359,-10.287 79.629,-10.287 ; 83.693,-11.303 84.786,-12.396 84.786,-12.729 DMT1.2 DMT1.1 ; 84.52,-3.367 DMT2.2 DMT2.1 ; DMT1.5 DMT1.6 85.486,-14.041 DMT1.8 85.486,-13.391 DMT1.1 ; DMT2.6 86.185,-5.89 ; 86.487,-11.811 86.454,-11.811 85.549,-12.716 85.536,-12.716 85.486,-12.766 DMT1.1
  Top Layer w0.4: 78.359,-0.635 79.756,-0.635 ; 79.629,-10.287 80.645,-10.287 ; 83.058,-10.668 83.693,-11.303 ; 83.629,-2.349 84.52,-3.24 84.52,-3.367 ; DMT2.5 DMT2.6 85.17,-5.878 85.12,-5.828 85.12,-5.228 DMT2.8@84.972,-5.08 ; DMT2.8 84.845,-4.853 85.17,-4.528 DMT2.1 ; 86.185,-5.89 87.17,-5.89 ; 86.487,-11.811 88.265,-11.811
  Top Layer w0.5: 79.756,-0.635 81.915,-0.635 83.629,-2.349 ; 80.645,-10.287 82.677,-10.287 83.058,-10.668 ; DMT2.8 DMT2.8@84.972,-5.08 ; 87.17,-5.89 91.281,-5.89 91.44,-6.05 C6.1@91.44,-6.437 ; 88.265,-11.811 88.646,-11.811 89.662,-12.827 C3.1 91.948,-6.223 C6.1 102.336,-6.096 102.9,-6.661 C24.1 102.997,-6.664 102.997,-9.719 C25.1 106.132,-9.722 106.955,-10.545 Regulator1.3
NetC4_2: C4.2 DMT1.4 DMT1.7 F1.2 LM1.4 TVS1.1 | length 37.6
  Top Layer w0.3: LM1.4 81.035,-15.993 81.407,-15.621 ; DMT1.7@84.161,-13.741 84.161,-14.629 DMT1.4 84.186,-15.479 84.582,-15.875
  Top Layer w0.4: 81.407,-15.621 81.788,-15.24 ; 84.582,-15.875 85.217,-16.51
  Top Layer w0.5: 81.788,-15.24 83.287,-13.741 DMT1.7@84.161,-13.741 ; 85.217,-16.51 87.63,-18.923 89.789,-18.923 91.186,-20.32 C4.2 91.059,-20.574 84.455,-20.574 TVS1.1 84.328,-21.019 90.424,-27.115 90.424,-27.686 F1.2@95.504,-27.686
NetC5_1: C5.1 LM2.1 | length 4.8
  Top Layer w0.3: 76.454,-7.239 77.675,-7.239 77.765,-7.149 LM2.1
  Top Layer w0.4: 75.819,-7.239 76.454,-7.239
  Top Layer w0.5: C5.1 73.841,-6.35 74.73,-7.239 75.819,-7.239
NetC5_2: C5.2 LM2.7 | length 6.9
  Top Layer w0.3: 77.978,-4.318 78.415,-3.881 LM2.7 LM2.7@78.325,-2.713
  Top Layer w0.4: 77.216,-4.699 77.597,-4.699 77.978,-4.318
  Top Layer w0.5: C5.2 73.841,-3.81 74.73,-4.699 77.216,-4.699
NetC7_2: C7.2 DMT2.4 DMT2.7 F2.2 LM2.4 TVS2.1 | length 49.7
  Top Layer w0.3: 77.216,-9.271 78.74,-9.271 79.715,-8.296 LM2.4 LM2.4@79.625,-7.193 ; LM2.4@79.805,-7.239 80.772,-7.239 ; 83.058,-6.604 83.169,-6.604 83.87,-5.903 DMT2.4
  Top Layer w0.4: 74.041,-9.271 77.216,-9.271 ; 80.772,-7.239 81.28,-7.239 ; 82.677,-6.604 83.058,-6.604
  Top Layer w0.5: 74.041,-9.271 72.136,-9.271 70.485,-7.62 70.485,-3.175 72.263,-1.397 73.152,-1.397 75.057,0.508 C7.2 78.232,0.762 TVS2.1 82.995,5.143 87.82,5.143 88.011,4.953 F2.2@93.091,4.953 ; 81.28,-7.239 81.407,-7.239 82.042,-6.604 ; 82.677,-6.604 82.042,-6.604 ; DMT2.7 83.82,-5.093 83.612,-5.301 83.345,-5.301 82.042,-6.604
NetC18_2: C18.2 STM1.73 | length 3.7
  Top Layer w0.3: STM1.73 26.162,-12.907
  Top Layer w0.4: 26.162,-12.907 26.369,-12.907 27.186,-13.724 27.286,-13.724 27.686,-14.124 C18.2@27.686,-14.224
NetC19_1: C19.1 STM1.48 | length 4.8
  Top Layer w0.3: 21.463,-27.686 21.891,-27.258 STM1.48
  Top Layer w0.4: C19.1 19.812,-29.237 20.612,-28.437 20.612,-28.174 20.846,-27.94 21.209,-27.94 21.463,-27.686
NetD1_2: D1.2 D2.1 LED2.1 | length 19.7
  Top Layer w0.5: D1.2 81.788,10.541 83.566,8.763 84.328,8.763 86.229,10.664 86.546,10.664 87.122,11.239 LED2.1 87.122,14.986 91.567,19.431 D2.1
NetD2_2: D2.2 D3.1 LED3.1 | length 18.6
  Top Layer w0.5: D2.2 92.024,10.465 93.421,10.465 94.742,9.144 97.091,9.144 99.187,11.239 LED3.1 99.763,12.26 99.763,16.832 102.362,19.431 D3.1
NetD3_2: D3.2 F2.1 LED4.1 | length 16.7
  Top Layer w0.5: LED4.1 107.315,11.222 106.634,10.541 D3.2 104.521,8.763 104.521,4.953 F2.1@109.601,4.953
NetD4_1: D4.1 J1.1 | length 17.9
  Top Layer w0.5: J1.1 82.022,-52.791 83.714,-54.483 91.46,-54.483 93.619,-52.324 D4.1
NetD4_2: D4.2 D5.1 Q1.3 R5.2 | length 34.4
  Top Layer w0.5: Q1.3 89.638,-35.203 92.329,-32.512 95.758,-32.512 97.089,-33.843 R5.2 97.089,-45.913 D4.2 96.584,-45.974 90.454,-52.104 89.628,-52.104 D5.1
NetD6_A: D6.A STM1.24 | length 14.9
  Top Layer w0.3: 6.731,-24.892 8.206,-23.417 9.201,-23.417 STM1.24
  Top Layer w0.4: D6.A -1.651,-32.474 -1.351,-32.174 -0.551,-32.174 6.731,-24.892
NetD6_K: D6.K R8.2 | length 4.1
  Top Layer w0.4: D6.K -3.521,-32.797 -3.521,-36.799 R8.2
NetD7_A: D7.A STM1.25 | length 10.9
  Top Layer w0.3: 7.366,-25.146 8.001,-24.511 8.001,-24.497 8.591,-23.907 STM1.25
  Top Layer w0.4: D7.A@4.633,-32.512 4.633,-27.879 7.366,-25.146
NetD7_K: D7.K R9.2 | length 4.2
  Top Layer w0.4: R9.2 D7.K
NetDMT1_3: DMT1.3 LM1.2 LM1.6 | length 9.8
  Top Layer w0.3: LM1.2 78.669,-14.213 79.319,-13.563 ; LM1.6 79.319,-13.563 ; DMT1.3 80.103,-12.779 79.319,-13.563
NetDMT2_3: DMT2.3 LM2.2 LM2.6 | length 9.8
  Top Layer w0.3: LM2.2 78.415,-5.233 78.949,-4.699 ; LM2.6 79.065,-4.583 78.949,-4.699 ; DMT2.3 81.328,-4.016 80.645,-4.699 78.949,-4.699
NetLED1_2: LED1.2 R1.2 | length 6.8
  Top Layer w0.5: LED1.2 72.644,17.561 73.056,17.973 R1.2
NetLED2_2: LED2.2 R2.2 | length 6.9
  Top Layer w0.5: LED2.2 84.582,17.434 85.121,17.973 R2.2
NetLED3_2: LED3.2 R3.2 | length 6.7
  Top Layer w0.5: LED3.2 96.647,12.325 97.663,13.341 R3.2
NetLED4_2: LED4.2 R4.2 | length 7.1
  Top Layer w0.5: R4.2 108.808,17.973 109.855,16.926 LED4.2
NetLED5_1: LED5.1 R6.1 | length 7.6
  Top Layer w0.5: R6.1 90.231,-38.229 92.837,-35.623 LED5.1
NetQ1_2: Q1.2 R6.2 | length 8.1
  Top Layer w0.5: Q1.2 84.328,-37.303 88.331,-41.306 R6.2
RST: C21.8
SHT_SCL: SHT1.4 STM1.46 | length 15.9
  Top Layer w0.3: SHT1.4@17.272,-34.417 13.97,-31.115 13.97,-28.575 15.621,-26.924 20.447,-26.924 20.881,-26.49 20.881,-25.597 STM1.46
SHT_SDA: SHT1.3 STM1.47 | length 17.4
  Top Layer w0.3: SHT1.3@19.812,-34.417 18.161,-32.766 16.559,-32.766 14.605,-30.812 14.605,-28.829 15.875,-27.559 20.448,-27.559 21.381,-26.626 21.381,-25.597 STM1.47
SOUND_OUT: JP1.2 STM1.22 | length 24.3
  Top Layer w0.3: 6.096,-24.638 8.317,-22.417 9.201,-22.417 STM1.22
  Top Layer w0.4: JP1.2 -11.557,-30.353 -9.525,-28.321 2.413,-28.321 6.096,-24.638
pads on no net: Bat_holder1. ESP1.3 ESP1.4 ESP1.5 ESP1.6 ESP1.7 ESP1.8 ESP1.11 ESP1.12 ESP1.13 ESP1.14 ESP1.15 ESP1.16 ESP1.17 ESP1.18 ESP1.19 ESP1.20 ESP1.21 ESP2.2 ESP2.3 ESP2.4 ESP2.5 ESP2.6 ESP2.7 ESP2.8 ESP2.9 ESP2.10 ESP2.11 ESP2.12 ESP2.13 ESP2.14 ESP2.15 ESP2.16 ESP2.17 ESP2.18 ESP2.19 ESP2.20 J1. J1.3 LM1.3 LM1.5 LM2.3 LM2.5 Regulator1.4 STM1.1 STM1.2 STM1.3 STM1.4 STM1.5 STM1.7 STM1.8 STM1.9 STM1.15 STM1.16 STM1.17 STM1.18 STM1.23 STM1.32 STM1.33 STM1.34 STM1.35 STM1.36 STM1.37 STM1.38 STM1.39 STM1.40 STM1.41 STM1.42 STM1.43 STM1.44 STM1.45 STM1.51 STM1.52 STM1.55 STM1.56 STM1.57 STM1.58 STM1.61 STM1.62 STM1.63 STM1.64 STM1.65 STM1.66 STM1.67 STM1.68 STM1.69 STM1.70 STM1.71 STM1.77 STM1.78 STM1.79 STM1.80 STM1.81 STM1.82 STM1.83 STM1.84 STM1.85 STM1.86 STM1.87 STM1.88 STM1.90 STM1.91 STM1.95 STM1.96 STM1.97 STM1.98

## Polygon pours and split planes (outlines as drawn)
GND on Top Layer "GND_L01_P000" (solid, remove dead copper, pour order 0): -15.748,23.622 -14.351,25.019 114.935,25.019 115.189,25.273 116.586,23.876 116.84,23.876 116.84,-71.374 116.967,-71.501 115.57,-72.898 -13.97,-72.898 -15.621,-71.247 -15.875,-71.247 -15.875,23.876 -16.002,24.003
GND on Bottom Layer "GND_L02_P001" (solid, remove dead copper, pour order 1): -15.875,23.749 -14.224,25.4 114.808,25.4 116.332,23.876 116.84,23.876 116.84,-71.374 117.094,-71.628 115.697,-73.025 -13.716,-73.025 -13.843,-73.152 -16.129,-70.866 -16.129,23.241 -15.748,23.622

## Keep-outs
Keep-Out Layer:
  circle w0.254: c0.257,13.843 r1.991
  lines w0.254: -12.26,24.621 ccw(c-13.208,22.86) -12.216,24.596 ; -11.519,-69.399 ccw(c-13.208,-70.485) -11.498,-69.433 ; 57.572,14.972 ccw(c55.872,13.843) 57.646,14.852 ; 115.682,24.744 ccw(c114.427,22.987) 115.761,24.685 ; 115.932,-69.223 ccw(c114.427,-70.612) 115.99,-69.289 ; -15.621,-70.993 -15.621,23.749 -14.097,25.273 115.189,25.273 116.713,23.749 116.713,-71.247 115.189,-72.771 -13.843,-72.771 -15.621,-70.993

## Silkscreen, mask and mechanical layers (free items; w line width, h text height)
Top Overlay:
  lines w0.254: -14.351,-67.945 -14.351,-39.878 ; -14.224,-67.945 40.894,-67.945 ; -14.224,-39.751 40.894,-39.751 40.894,-67.818 ; 42.291,-67.945 70.104,-67.945 ; 42.291,-12.065 70.104,-12.065
  text "SWO" at -6.223,1.143 h1
  text "3V3" at -6.096,-1.651 h1
  text "SDIO" at -5.969,-4.191 h1
  text "SCLK" at -6.096,-6.858 h1
  text "SDA" at 53.086,-8.509 h1 r90
  text "SCL" at 55.88,-8.509 h1 r90
  text "GND" at 58.674,-8.509 h1 r90
  text "3V3" at 61.214,-8.509 h1 r90
  text "GND" at -6.096,-9.271 h1
  text "3V3" at 35.052,-11.049 h1
  text "GND" at 35.052,-13.716 h1
  text "3V3" at 45.466,-14.097 h1
  text "SCL" at 35.179,-16.256 h1
  text "3V3" at 45.593,-16.256 h1
  text "SDA" at 35.052,-18.923 h1
  text "3V3" at -9.906,-28.067 h1
  text "OUT" at -10.033,-30.607 h1
  text "GND" at -10.033,-33.274 h1
  text "SCL" at 17.526,-38.989 h1 r90
  text "SDA" at 20.193,-38.989 h1 r90
  text "GND" at 22.733,-38.989 h1 r90
  text "3V3" at 25.654,-38.989 h1 r90
  text "@IOT_GIAM SAT TU DIEN / @LIDP / @E401" at 83.82,-64.135 h2
  text "ETHERNET W5500" at -11.811,-66.167 h1.52
  text "ESP32 S3" at 50.927,-66.294 h1.52
  text "GND" at 45.72,-67.183 h1

## Text inside footprints (layer, text, board x,y; h text height)
D6: Mechanical 13 "+" at -0.834,-31.766 h1
D7: Mechanical 13 "+" at 5.45,-31.639 h1